# Altium PCB PoactuatorPCB4.PcbDoc (part 3 of 3)
Units mm, origin at the board's own origin, x right, y up, seen from the top; angles counter-clockwise.
Board outline 177.8 x 127 mm, 2 copper layers (Top Layer, Bottom Layer), stack 1.65 mm thick; 145 components, 104 nets, 572 pads, 279 vias.
Unrouted connection lines stored in the file: 19.
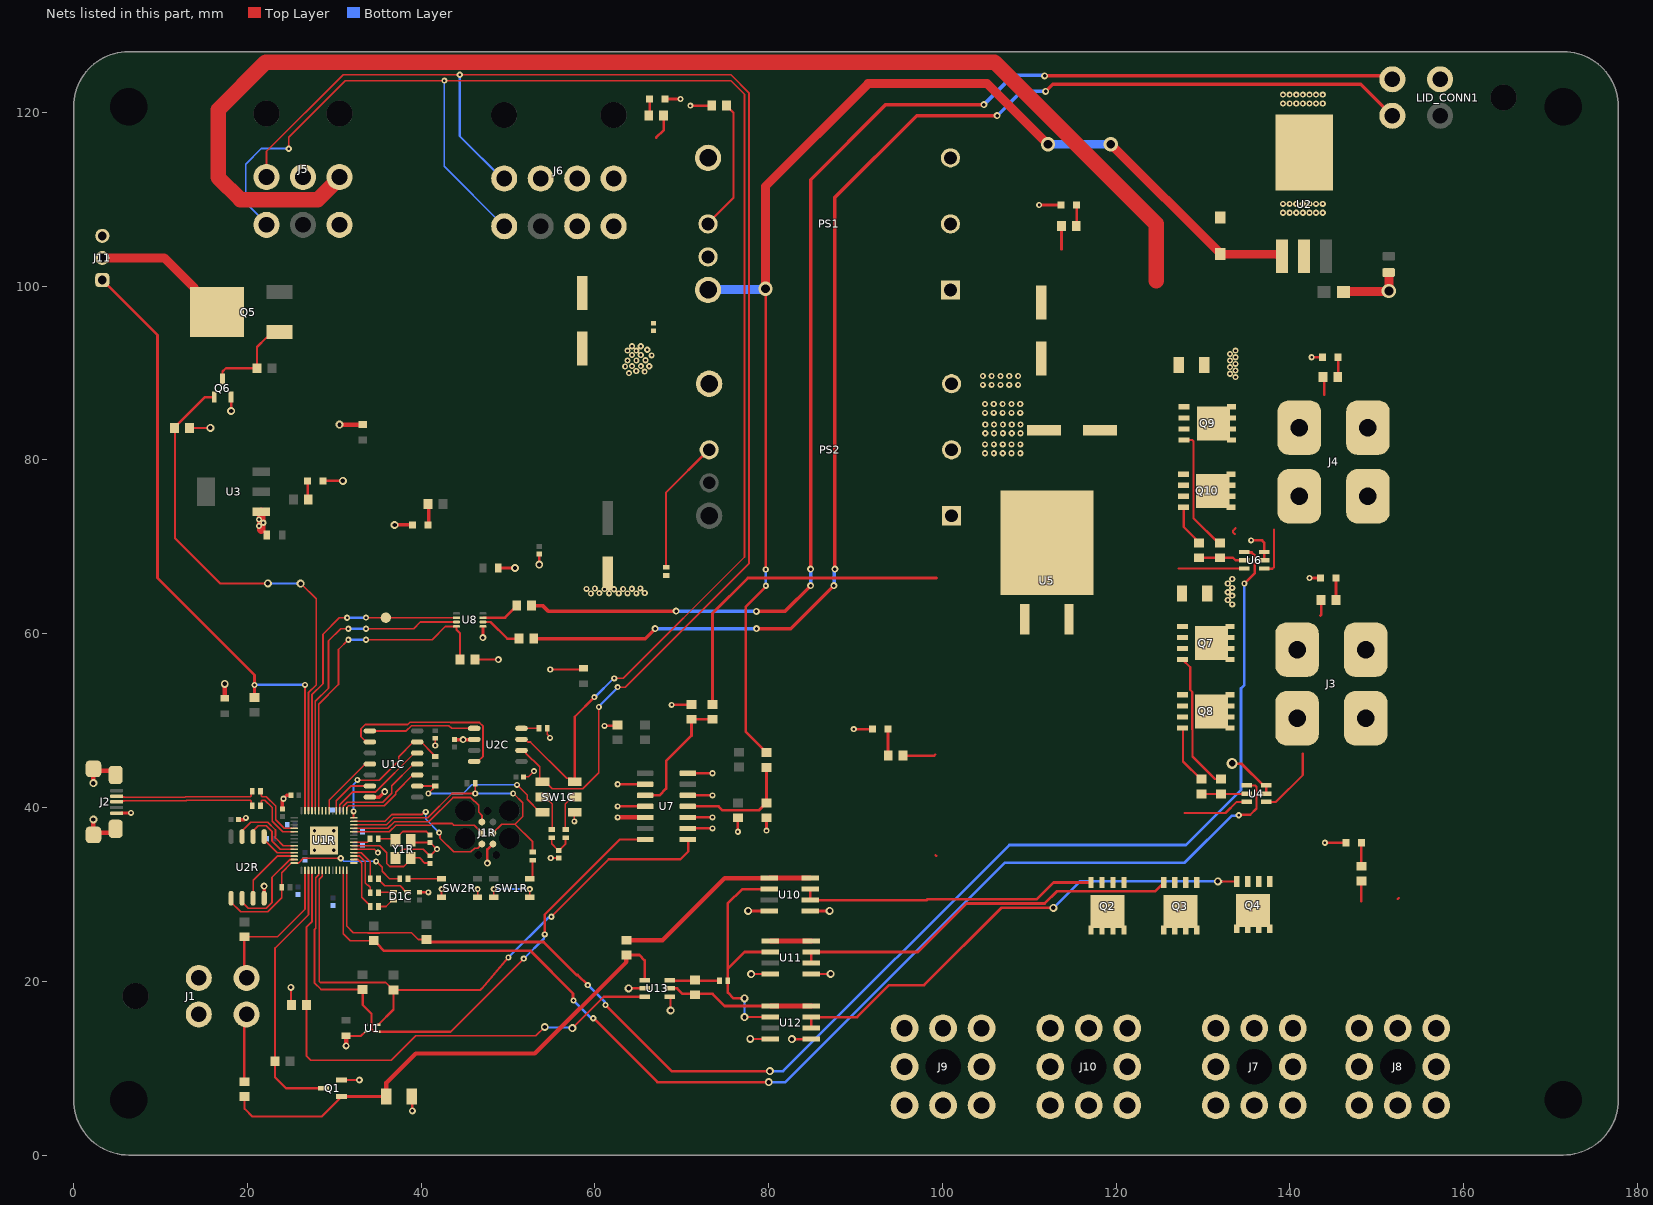
[diagram p2: the nets of this part, all layers, seen from the top]

## Via types
v1: diameter 0.705, hole 0.305, Top Layer to Bottom Layer, tented both sides, 119 vias
v2: diameter 0.7, hole 0.3, Top Layer to Bottom Layer, tented both sides, 51 vias
v3: diameter 0.711, hole 0.305, Top Layer to Bottom Layer, tented both sides, 35 vias
v4: diameter 0.914, hole 0.508, Top Layer to Bottom Layer, tented both sides, 35 vias
v5: diameter 0.8, hole 0.4, Top Layer to Bottom Layer, tented both sides, 28 vias
v6: diameter 1.15, hole 0.7, Top Layer to Bottom Layer, tented both sides, 6 vias
v7: diameter 1.651, hole 1.016, Top Layer to Bottom Layer, tented both sides, 4 vias
v8: diameter 1.27, hole 0.711, Top Layer to Bottom Layer, tented both sides, 1 vias

## Nets (pads, with @x,y where several pads share a name; then routed paths per layer and width w, separated by ;. In a path a pad name is that pad's centre, name@x,y a point inside that pad or via, vN(x,y) a via of type N, cw(c..) or ccw(c..) an arc to the next point about the centre after c; other vN are vias at no path point) (continued)
15V: C5.1 C9.1 C81.1 J5.6 J6.7 J6.8 PS1.7 PS1.8 R21.1 R41.1 U2.1 | length 149.1
  Top Layer w0.305: 67.056,117.094 67.907,117.945 R41.1@67.907,119.634 ; v7(79.629,99.695) 79.66,99.664 v3(79.66,67.39) ; v3(79.68,65.52) 79.68,65.42 77.343,63.083 77.343,48.73 R21.1@79.756,46.317
  Top Layer w1.016: v7(79.629,99.695) 79.629,111.506 91.44,123.317 105.156,123.317 v7(112.141,116.332) ; v7(119.38,116.332) 119.393,116.332 131.953,103.772 C5.1@131.953,103.683 138.62,103.683 138.811,103.492 U2.1@138.811,103.416
  Bottom Layer w0.254: v3(79.66,67.39) 79.67,67.38 79.67,65.53 v3(79.68,65.52) ; v7(112.141,116.332) v7@112.204,116.268
  Bottom Layer w1.016: PS1.8@73.079,99.632 79.566,99.632 v7(79.629,99.695) ; v7@112.204,116.268 112.268,116.332 v7(119.38,116.332)
15V_MEAS: R21.2 R25.1 U7.11 | length 13.7
  Top Layer w0.254: 74.694,39.678 78.858,39.678 ; R25.1@79.692,40.513 R25.1@79.756,40.513
  Top Layer w0.305: U7.11@70.696,40.132 74.24,40.132 74.694,39.678 ; 78.858,39.678 R25.1@79.692,40.513 ; R25.1@79.756,40.513 R21.2@79.756,44.615
ACT_CHECK_3.3V: U1R.38 U8.3 | length 35.8
  Top Layer w0.2: U1R.38@27.829,39.643 27.829,52.213 29.337,53.721 29.337,59.182 30.734,60.579 v3(31.623,60.579)
  Top Layer w0.203: v3(33.655,60.579) 39.152,60.579 39.918,61.345 U8.3@44.068,61.345
  Bottom Layer w0.254: v3(31.623,60.579) v3(33.655,60.579)
ACT_CHECK_5V: LID_CONN1.4 R47.1 | length 152.9
  Top Layer w0.406: R47.1@52.959,59.436 65.786,59.436 v5(66.929,60.579) ; v5(78.6,60.58) v5(78.6,60.58) 82.55,60.579 v5(87.503,65.532) ; v5(87.63,67.437) 87.63,110.236 97.028,119.634 v5(106.299,119.634) ; v5(111.887,122.428) 112.689,123.23 148.16,123.23 LID_CONN1.4@151.78,119.61
  Bottom Layer w0.254: v5(87.503,65.532) v5@87.566,65.596 ; v5@87.566,67.373 v5(87.63,67.437)
  Bottom Layer w0.406: v5(66.929,60.579) v5(78.6,60.58) ; v5@87.566,65.596 v5@87.566,67.373 ; v5(106.299,119.634) 109.093,122.428 v5(111.887,122.428)
ACT_PWM_3.3V: "PWM 3V3.TP" U1R.39 U8.2 | length 37
  Top Layer w0.2: U1R.39@27.429,39.643 27.429,52.981 28.702,54.254 28.702,59.944 30.595,61.837 v3(31.484,61.837)
  Top Layer w0.203: v3(33.655,61.849) U8.2@44.064,61.849
  Bottom Layer w0.254: v3(31.484,61.837) 31.49,61.843 33.649,61.843 v3(33.655,61.849)
ACT_PWM_5V: LID_CONN1.3 R38.1 | length 152.6
  Top Layer w0.305: R38.1@52.705,63.182 R38.1@52.705,63.246
  Top Layer w0.406: R38.1@52.705,63.246 53.975,63.246 54.61,62.611 v5(69.342,62.611) ; v5(78.58,62.58) 81.884,62.58 v5(84.836,65.532) ; v5(84.836,67.437) 84.836,112.268 93.472,120.904 v5(104.775,120.904) ; v5(111.76,124.206) 151.384,124.206 LID_CONN1.3@151.78,123.81
  Bottom Layer w0.254: v5@111.664,124.302 v5(111.76,124.206)
  Bottom Layer w0.406: v5(69.342,62.611) 69.357,62.596 78.564,62.596 v5(78.58,62.58) ; v5(84.836,65.532) v5(84.836,67.437) ; v5(104.775,120.904) 108.173,124.302 v5@111.664,124.302
AUX_SWITCH: J1.4 R34.2 U1R.2 | length 17.6
  Top Layer w0.2: R34.2@19.658,25.123 R34.2@19.709,25.123 ; 26.629,28.28 U1R.2@26.629,32.768
  Top Layer w0.203: R34.2@19.709,25.123 23.472,25.123 26.629,28.28
  Top Layer w0.305: R34.2@19.658,25.123 19.658,20.642 J1.4@19.912,20.388
CANCLK_RP2CAN: U1C.6 U1R.32 | length 5.7
  Top Layer w0.2: U1R.32@30.229,39.643 30.229,40.78 31.914,42.465 U1C.6@34.104,42.465
CANH: J5.4 J6.5 SW1C.4 U2C.7 | length 186.4
  Top Layer w0.203: v3(24.765,115.824) 24.765,117.154 31.267,123.655 v3(42.672,123.655) ; v3@42.715,123.655 75.662,123.655 77.216,122.101 77.216,68.834 63.246,54.864 v2(62.23,54.864) ; U2C.7@51.554,47.84 51.998,47.84 52.296,47.542 52.577,47.542 56.764,43.355 57.279,43.355 SW1C.4@57.679,42.955
  Top Layer w0.254: SW1C.4@57.679,42.955 57.679,50.44 v2(59.944,52.705)
  Bottom Layer w0.203: J5.4@22.334,107.088 19.812,109.61 19.812,114.046 21.612,115.846 24.743,115.846 v3(24.765,115.824) ; v3(42.672,123.655) 42.672,113.783 49.367,107.088 J6.5@49.63,107.088
  Bottom Layer w0.254: v2(59.944,52.705) 60.008,52.705 62.167,54.864 v2(62.23,54.864)
CANL: J5.1 J6.1 SW1C.1 U2C.6 | length 175.4
  Top Layer w0.203: J5.1@22.207,112.561 22.207,115.525 31.015,124.333 v3(44.45,124.333) 75.665,124.333 77.724,122.274 77.724,68.072 63.5,53.848 v2(62.611,53.848) ; U2C.6@51.554,46.57 51.872,46.57 52.055,46.387 52.055,46.256 53.643,44.668 53.643,43.307 SW1C.1@53.979,42.972 ; SW1C.1@53.979,42.955 54.279,42.955 55.081,42.153 58.604,42.153 60.452,44.001 v2(60.452,51.562)
  Bottom Layer w0.254: v3(44.45,124.333) 44.45,117.268 J6.1@49.442,112.277 ; v2(60.452,51.562) 60.452,51.625 62.611,53.784 v2(62.611,53.848)
CANRX_RP2CAN: U1C.2 U2C.4 | length 21.5
  Top Layer w0.2: U1C.2@34.104,47.545 33.679,47.545 33.079,48.145 33.079,49.064 33.56,49.545 38.445,49.545 38.72,49.82 43.36,49.82 43.407,49.773 46.714,49.773 47.129,49.359 47.129,45.9 46.529,45.3 U2C.4@46.104,45.3
CANTX_RP2CAN: U1C.1 U2C.1 | length 12.4
  Top Layer w0.2: U1C.1@34.104,48.815 38.28,48.815 38.885,49.42 43.194,49.42 43.504,49.11 U2C.1@46.104,49.11
DBG_TX_RP2040: J1R.5 U1R.27 | length 18.3
  Top Layer w0.2: U1R.27@32.266,38.405 35.848,38.405 36.648,39.205 40.102,39.205 40.394,39.497 v2(40.53,39.497) ; v2(42.079,37.114) 42.17,37.024 42.17,36.464 43.739,34.895 45.725,34.895 46.153,35.324 46.523,35.324 J1R.5@46.994,35.795
  Bottom Layer w0.2: v2(40.53,39.497) 40.524,39.491 40.524,38.67 v2(42.079,37.114)
FAN_PWR: J11.2 Q5.3 | length 16.4
  Top Layer w1.016: J11.2@3.302,103.251 10.427,103.251 13.932,99.746 13.932,99.543 16.728,96.747 Q5.3@16.931,96.747
FAN_SWITCH: Q6.1 R9.1 U1R.40 | length 62.6
  Top Layer w0.2: v4@26.162,65.786 27.94,64.008 27.94,54.102 27.029,53.191 U1R.40@27.029,39.643
  Top Layer w0.254: R9.1@11.633,83.693 R9.1@11.633,83.757 ; R9.1@11.684,83.693 11.684,70.993 16.891,65.786 v4(22.352,65.786)
  Top Layer w0.305: R9.1@11.633,83.757 15.1,87.224 Q6.1@16.192,87.224
  Bottom Layer w0.254: v4(22.352,65.786) 22.366,65.772 26.109,65.772 v4(26.123,65.759)
FAN_TACH: J11.1 R10.2 U1R.41 | length 88.2
  Top Layer w0.2: v3@26.629,54.198 v3(26.629,54.112) 26.629,52.126 ; 26.629,52.126 U1R.41@26.629,39.643 26.629,52.126
  Top Layer w0.305: J11.1@3.302,100.711 9.652,94.361 9.652,66.421 20.828,55.245 R10.2@20.828,52.667
  Bottom Layer w0.305: v3(20.828,54.102) 20.833,54.107 26.538,54.107 v3@26.607,54.176
GND: C1.2 C1C.2 C1R.2 C2.2 C2C.1 C2R.2 C3.2 C3C.2 C3R.2 C4.2 C4C.2 C4R.2 C5.2 C5C.2 C5R.2 C6.2 C6R.2 C7.2 C7R.2 C8R.2 C9.2 C9R.2 C10.2 C10R.2 C11R.2 C12.2 C12R.2 C13.2 C13R.2 C14.2 C17.2 C18.2 C19.2 C80.2 C81.2 D1.2 D2.2 D3.2 D4.2 D5.2 D6.2 D7.2 D8.2 J1.1 J1.2 J1R.6 J2.5 J2.6 J2.7 J2.8 J2.9 J3.3 J3.4 J4.3 J4.4 J5.2 J6.2 J6.3 J6.4 J9.1 J10.1 J11.3 LID_CONN1.1 PS1.2 PS1.3 PS1.4 PS2.2 PS2.3 PS2.4 Q1.2 Q6.2 R3.1 R6C.2 R9.2 R11.2 R12.2 R13.2 R24.2 R25.2 R26.2 R27.2 R37.2 SW1C.6 SW1R.B1 SW1R.B2 SW2R.B1 SW2R.B2 U1.4 U1C.7 U1R.19 U1R.57 U2.2 U2.4 U2C.2 U2R.4 U3.1 U4.2 U4.3 U6.2 U6.3 U7.2 U7.4 U7.5 U7.9 U7.10 U7.12 U7.14 U8.5 U10.4 U10.5 U11.4 U11.5 U12.4 U12.5 U13.2 U13.4 Y1R.2 Y1R.4 | length 159.6
  Top Layer w0.2: v5(29.929,35.105) U1R.57@30.029,35.205 ; U1R.19@32.266,35.205 34.629,35.205 v2(35.029,34.805) ; SW2R.B1@42.354,29.655 v2(42.354,30.605) ; SW2R.B2@46.504,29.655 v2(46.504,30.605) ; SW1R.B1@48.351,29.75 48.354,29.753 v2(48.354,30.605) ; C3C.2@51.793,43.525 51.805,43.537 52.361,43.537 52.992,44.168 v2(52.992,44.189) ; SW1R.B2@52.504,29.655 v2(52.504,30.605) ; R6C.2@54.504,49.11 54.504,48.435 54.829,48.11 v2(54.829,48.005) ; v2(54.915,34.19) 54.925,34.18 55.819,34.18 C2C.1@55.829,34.17 ; v2(57.629,38.405) 57.629,39.405 SW1C.6@57.679,39.455
  Top Layer w0.203: Y1R.4@37.051,34.205 37.051,34.355 37.903,35.207 40.242,35.207 41.009,34.44 C1R.2@41.029,34.44 41.049,34.44 v2@41.814,35.205 ; Y1R.2@38.829,36.237 39.096,35.97 C2R.2@41.029,35.97 41.049,35.97 v2@41.814,35.205 ; v2(41.629,47.135) C1C.2@41.629,47.97 C1C.2@41.629,48.024 ; v2(41.829,35.205) v2@41.814,35.205 ; SW1R.B1@48.351,29.75 SW1R.B1@48.419,29.682
  Top Layer w0.25: C5C.2@39.829,30.24 v2(40.829,30.24)
  Top Layer w0.254: R9.2@13.335,83.693 v4(15.748,83.693) ; Q6.2@18.098,87.224 Q6.2@18.129,87.192 ; v5(25.019,19.304) 25.019,17.348 R3.1@25.095,17.272 ; D2.2@28.702,77.597 v4(30.988,77.597) ; Q1.2@30.861,8.636 v5(32.893,8.636) ; C1.2@31.369,13.716 33.085,13.716 33.555,14.186 U1.4@33.655,14.186 ; R37.2@46.19,57.023 v5(48.895,57.023) ; v4(53.594,67.945) C80.2@53.594,69.17 ; v2(54.864,55.88) C17.2@58.757,55.88 ; v2(61.104,49.403) 62.522,49.403 R27.2@62.611,49.492 ; v2(62.611,42.672) U7.2@65.786,42.672 ; U13.2@65.735,19.177 U13.2@66.215,19.177 ; U13.4@68.631,18.227 68.707,18.151 v4(68.707,16.637) ; U7.12@70.696,41.402 v2(73.533,41.402) ; U7.14@70.696,43.942 v2(73.533,43.942) ; v3(70.993,120.777) R12.2@73.439,120.777 ; v4(77.627,28.097) v4@77.643,28.082 ; v4(77.881,13.365) 77.897,13.35 80.173,13.35 U12.4@80.188,13.335 ; v4(77.978,20.828) U11.4@80.188,20.828 ; U10.4@80.173,28.082 U10.4@80.188,28.067 ; v4(82.677,13.335) U12.5@84.912,13.335 ; U11.5@84.912,20.828 84.927,20.843 v4(87.137,20.843) v4@87.152,20.858 ; U10.5@84.912,28.067 U10.5@84.927,28.082 ; v4@87.01,28.082 v4(87.025,28.097) ; v3(135.528,70.739) v3@135.616,70.652 ; U6.3@136.586,69.53 136.713,69.403 U6.3@137.033,69.403 ; v3(144.018,35.941) D8.2@146.431,35.941
  Top Layer w0.3: v5(47.631,33.597) 47.631,35.162 J1R.6@48.264,35.795
  Top Layer w0.305: J2.5@5.469,39.35 5.484,39.365 6.589,39.365 v3(6.604,39.38) ; v4(18.129,85.63) Q6.2@18.129,87.192 ; C2.2@38.925,6.731 38.989,6.667 v5(38.989,5.08) ; v5@47.115,59.565 U8.5@47.115,60.842 ; C19.2@48.895,67.564 v4(50.8,67.564) ; v2(62.611,40.132) U7.4@65.786,40.132 ; v4(63.881,19.177) U13.2@65.735,19.177 ; D4.2@68.072,121.539 v3(69.85,121.539) ; v2(68.834,51.816) R24.2@71.082,51.816 ; U7.9@70.696,37.592 v2(73.533,37.592) ; U7.10@70.696,38.862 v2(73.533,38.862) ; v2(76.454,37.211) R26.2@76.454,38.811 ; v4@77.643,28.082 U10.4@80.173,28.082 ; v2(79.756,37.338) R25.2@79.756,38.811 ; U10.5@84.927,28.082 v4@87.01,28.082 ; v2(89.789,49.022) D5.2@91.948,49.022 ; v3(111.125,109.347) D1.2@113.665,109.347 ; v8(133.35,45.085) 133.401,45.034 134.442,45.034 136.931,42.545 U4.3@137.287,42.545 U4.2@137.287,41.595 ; v3(135.528,70.739) 136.779,70.739 137.033,70.485 U6.3@137.033,69.403 U6.2@137.033,68.453 ; v3(142.24,66.421) D7.2@143.51,66.421 ; v3(142.494,91.821) D6.2@143.764,91.821 D6.2@143.853,91.821
  Top Layer w0.4: C3R.2@18.994,38.605 19.629,38.605 v2(19.829,38.805) ; U2R.4@21.934,29.554 v5(21.934,30.958) ; C4R.2@24.029,39.84 24.029,40.799 24.154,40.924 v2(24.154,41.005) 24.554,41.405 25.031,41.405 C10R.2@25.038,41.412 ; U1C.7@34.104,41.195 35.192,41.195 v5(35.816,41.818) ; C4C.2@43.829,47.84 43.847,47.823 44.812,47.823 v5(44.829,47.805) 44.847,47.823 46.086,47.823 U2C.2@46.104,47.84
  Top Layer w0.406: v4(36.957,72.517) D3.2@38.989,72.517
  Top Layer w0.508: J2.8@2.286,36.85 v4(2.286,38.618) ; v4(2.286,42.809) 2.286,43.942 2.55,44.206 4.38,44.206 J2.6@4.836,43.75 ; J2.8@2.794,36.85 2.794,36.971 2.917,37.094 4.38,37.094 J2.7@4.836,37.55 ; C18.2@17.399,52.705 v4(17.399,54.229) ; v4(30.607,84.074) C3.2@33.274,84.074 ; v5(31.369,12.573) C1.2@31.369,13.716 ; v2(62.611,38.862) U7.5@65.786,38.862
  Top Layer w1.016: U3.1@21.59,74.027 21.607,74.027 21.599,74.019 21.599,73.152 21.599,71.987 ; C6.2@146.234,99.187 146.234,99.232 146.38,99.377 151.32,99.377 v7(151.384,99.441) R11.2@151.384,101.257
  Top Layer w1.778: U2.4@141.351,115.367 U2.4@141.478,115.494
  Bottom Layer w0.254: v2(48.354,30.605) v2(52.504,30.605) ; v2@54.846,55.862 v2(54.864,55.88) ; v2@62.491,38.862 v2(62.611,38.862)
  other v1: 133.35,63.373 132.842,63.881 133.35,64.389 59.54,64.63 61.64,64.65 62.738,64.643 63.76,64.65 64.77,64.64 60.51,64.67 65.74,64.68 132.842,64.77 61.1,65.13 62.2,65.12 59.03,65.16 63.246,65.151 64.26,65.17 60,65.21 65.23,65.22 133.35,65.278 132.842,65.786 133.35,66.294 21.336,72.39 21.844,72.771 21.336,73.152 104.902,80.772 105.918,80.772 106.934,80.772 107.95,80.772 108.966,80.772 104.902,81.788 105.918,81.788 106.934,81.788 107.95,81.788 108.966,81.788 104.922,83.072 105.938,83.072 106.954,83.072 107.97,83.072 108.986,83.072 104.922,84.088 105.938,84.088 106.954,84.088 107.97,84.088 108.986,84.088 104.892,85.422 105.908,85.422 106.924,85.422 107.94,85.422 108.956,85.422 104.892,86.438 105.908,86.438 106.924,86.438 107.94,86.438 108.956,86.438 104.648,88.646 105.664,88.646 106.68,88.646 107.696,88.646 108.712,88.646 133.731,89.535 104.648,89.662 105.664,89.662 106.68,89.662 107.696,89.662 108.712,89.662 133.096,89.916 63.93,89.99 65.73,90.16 64.76,90.24 133.731,90.297 133.096,90.678 63.48,90.76 66.26,90.78 64.276,90.798 65.292,90.798 133.731,91.059 63.754,91.44 64.77,91.44 133.096,91.44 65.83,91.47 133.731,91.821 66.53,92.03 64.262,92.075 65.278,92.075 133.096,92.202 63.754,92.583 64.77,92.583 133.731,92.583 66.02,92.69 64.262,93.091 65.278,93.091 139.192,108.458 139.954,108.458 140.716,108.458 141.478,108.458 142.24,108.458 143.002,108.458 143.764,108.458 139.192,109.474 139.954,109.474 140.716,109.474 141.478,109.474 142.24,109.474 143.002,109.474 143.764,109.474 139.192,121.031 139.954,121.031 140.716,121.031 141.478,121.031 142.24,121.031 143.002,121.031 143.764,121.031 139.192,122.047 139.954,122.047 140.716,122.047 141.478,122.047 142.24,122.047 143.002,122.047 143.764,122.047
  other v5: 27.729,35.105 27.729,37.305 29.929,37.305 47.117,59.563
INT_RP2CAN: U1C.4 U1R.34 | length 7.5
  Top Layer w0.2: U1R.34@29.429,39.705 29.429,40.863 33.571,45.005 U1C.4@34.104,45.005
KILL_SWITCH: J1.3 R8.2 | length 7.9
  Top Layer w0.254: R8.2@19.658,8.46 R8.2@19.685,8.433
  Top Layer w0.305: R8.2@19.658,8.46 19.658,15.934 J1.3@19.912,16.188
LEDB_RP2CAN: R8C.1 U1R.18 | length 4.3
  Top Layer w0.2: U1R.18@32.266,34.805 33.101,34.805 34.154,33.752 R8C.1@34.154,31.805
LEDG_RP2CAN: R7C.1 U1R.17 | length 5.4
  Top Layer w0.2: U1R.17@32.266,34.405 32.935,34.405 33.579,33.761 33.579,31.306 33.829,31.055 33.904,31.055 34.154,30.805 R7C.1@34.154,30.205
LEDR_RP2CAN: R5C.1 U1R.16 | length 6.5
  Top Layer w0.2: U1R.16@32.266,34.005 32.77,34.005 33.179,33.596 33.179,29.68 34.154,28.705 R5C.1@34.154,28.605
LVL_SHIFT_EN: R37.1 U1R.37 U8.4 | length 38.1
  Top Layer w0.2: U1R.37@28.229,39.643 28.229,39.98 28.229,51.902 30.494,54.167 30.494,54.18
  Top Layer w0.203: 30.494,54.18 30.494,58.18 v3(31.623,59.309) ; v3(33.655,59.309) 41.275,59.309 42.811,60.845 U8.4@44.068,60.845
  Top Layer w0.254: U8.4@44.068,60.845 44.068,60.455 44.488,60.034 R37.1@44.488,57.023
  Bottom Layer w0.254: v3(31.623,59.309) v3(33.655,59.309)
MISO_RP2CAN: U1C.12 U1R.31 | length 12.1
  Top Layer w0.2: U1R.31@30.629,39.643 30.629,40.311 32.113,41.795 34.757,41.795 39.237,46.275 U1C.12@39.554,46.275
MOSI_RP2CAN: U1C.11 U1R.30 | length 11.5
  Top Layer w0.2: U1R.30@31.029,39.643 31.029,40.146 31.478,40.595 35.582,40.595 36.629,41.642 36.629,42.505 39.129,45.005 U1C.11@39.554,45.005
MOTOR_EN: R1.1 R5.2 U13.6 | length 5.9
  Top Layer w0.305: U13.6@68.43,20.053 71.755,20.053 R5.2@74.328,20.053
MOTOR_PWR: J7.1 J8.1 Q2.D Q3.D Q4.D R46.1 | length 2.5
  Top Layer w0.254: 148.209,29.21 R46.1@148.209,31.534 ; 152.4,29.464 152.527,29.591
nCS_RP2CAN: R4C.2 U1C.13 U1R.28 | length 16.4
  Top Layer w0.2: v2(32.229,39.545) 32.229,38.805 U1R.28@32.266,38.805 ; v2(32.659,43.175) 32.699,43.135 35.159,43.135 37.422,45.398 37.422,45.838 39.129,47.545 U1C.13@39.554,47.545 39.979,47.545 41.354,46.17 41.354,46.055 41.529,45.88 R4C.2@41.629,45.88
  Bottom Layer w0.2: v2(32.229,39.545) 32.229,42.686 32.659,43.116 v2(32.659,43.175)
NetC2_1: C2.1 Q1.1 R6.2 R8.1 U13.1 | length 59.4
  Top Layer w0.254: R8.1@19.685,6.731 19.685,5.334 20.574,4.445 28.575,4.445 Q1.1@30.861,6.731
  Top Layer w0.305: Q1.1@30.861,6.731 C2.1@36.005,6.731 ; R6.2@63.627,23.025 65.113,23.025 65.735,22.403 U13.1@65.735,20.127
  Top Layer w0.508: C2.1@36.005,6.731 36.005,8.319 39.37,11.684 53.086,11.684 63.627,22.225 R6.2@63.627,23.025
NetC2C_2: C2C.2 R2C.2 R3C.2 | length 3.7
  Top Layer w0.2: R2C.2@55.029,36.53 55.029,35.82 55.809,35.04 C2C.2@55.829,35.04 55.849,35.04 56.629,35.82 R3C.2@56.629,36.53
NetC2R_1: C2R.1 R1R.2 Y1R.3 | length 6.7
  Top Layer w0.203: R1R.2@35.077,36.405 36.883,36.405 Y1R.3@37.051,36.237 37.051,36.387 37.903,37.239 40.61,37.239 41.009,36.84 C2R.1@41.029,36.84
NetD1_1: D1.1 R40.2 | length 2.4
  Top Layer w0.254: R40.2@115.405,106.934 R40.2@115.443,106.972
  Top Layer w0.305: R40.2@115.443,106.972 D1.1@115.443,109.347
NetD1C_1: D1C.1 R5C.2 | length 2
  Top Layer w0.2: R5C.2@35.104,28.605 35.954,28.605 36.704,29.355 D1C.1@36.829,29.355
NetD1C_2: D1C.2 R7C.2 | length 1.7
  Top Layer w0.2: R7C.2@35.104,30.205 35.154,30.255 D1C.2@36.829,30.255
NetD1C_3: D1C.3 R8C.2 | length 4
  Top Layer w0.2: R8C.2@35.104,31.805 35.104,31.705 35.829,30.98 37.579,30.98 38.304,30.255 D1C.3@38.429,30.255
NetD2_1: D2.1 R39.2 | length 2.2
  Top Layer w0.254: D2.1@26.924,77.597 26.94,77.581 R39.2@26.94,75.438
NetD3_1: D3.1 R42.2 | length 2.2
  Top Layer w0.406: D3.1@40.894,72.809 R42.2@40.894,75.057
NetD4_1: D4.1 R41.2 | length 1.9
  Top Layer w0.254: R41.2@66.205,119.634 R41.2@66.294,119.723
  Top Layer w0.305: R41.2@66.294,119.723 D4.1@66.294,121.539
NetD5_1: D5.1 R44.2 | length 3.1
  Top Layer w0.254: R44.2@93.726,46.012 R44.2@93.764,45.974
  Top Layer w0.305: R44.2@93.726,46.012 D5.1@93.726,49.022
NetD6_1: D6.1 R43.2 | length 2.3
  Top Layer w0.254: R43.2@145.504,89.535 R43.2@145.542,89.573
  Top Layer w0.305: R43.2@145.542,89.573 D6.1@145.542,91.821
NetD7_1: D7.1 R45.2 | length 2.5
  Top Layer w0.305: R45.2@145.288,63.881 D7.1@145.288,66.421
NetD8_1: D8.1 R46.2 | length 2.7
  Top Layer w0.254: R46.2@148.209,33.236 D8.1@148.209,35.941
NetPS1_6: PS1.6 R12.1 | length 15
  Top Layer w0.254: PS1.6@73.045,107.265 75.946,110.166 75.946,119.977 R12.1@75.146,120.777
NetPS2_6: PS2.6 R13.1 | length 15.7
  Top Layer w0.254: R13.1@68.199,67.658 68.199,76.267 PS2.6@73.192,81.26
NetQ2_4: Q2.4 U10.6 U10.7 | length 34.4
  Top Layer w0.305: U10.7@84.785,30.607 U10.6@84.785,29.337 98.184,29.337 98.304,29.458 110.865,29.458 112.776,31.369 Q2.4@117.094,31.369
NetQ3_4: Q3.4 U11.6 U11.7 | length 45.1
  Top Layer w0.254: U11.6@84.912,22.098 U11.7@84.912,23.368
  Top Layer w0.305: U11.7@84.912,23.368 97.18,23.368 102.765,28.953 111.757,28.953 113.157,30.353 124.46,30.353 Q3.4@125.476,31.369
NetQ4_4: Q4.4 U12.6 U12.7 | length 57.2
  Top Layer w0.254: U12.6@84.912,14.605 U12.7@84.912,15.875 ; v4(131.699,31.496) Q4.4@133.858,31.496
  Top Layer w0.305: U12.7@84.912,15.875 90.17,15.875 93.853,19.558 97.879,19.558 106.769,28.448 v4(112.776,28.448)
  Bottom Layer w0.254: v4(131.699,31.496) 132.207,31.496
  Bottom Layer w0.305: v4(112.776,28.448) 115.824,31.496 v4(131.699,31.496)
NetQ5_1: Q5.1 Q6.3 R7.2 | length 10.6
  Top Layer w0.254: Q6.3@17.145,89.306 17.149,89.31 17.149,90.174 17.526,90.551 R7.2@21.12,90.551 21.12,93.002 22.187,94.069 22.885,94.069 Q5.1@23.578,94.762
NetQ7_4: Q7.4 R15.1 | length 16
  Top Layer w0.254: Q7.4@127.635,57.023 128.524,56.134 128.524,53.536 128.756,53.304 128.756,48.963 128.778,48.941 128.778,45.867 131.376,43.269 R15.1@132.08,43.269
NetQ8_4: Q8.4 R16.1 | length 6.8
  Top Layer w0.254: Q8.4@127.698,49.149 127.698,45.301 129.731,43.269 R16.1@129.794,43.269
NetQ9_4: Q9.4 R18.1 | length 14.1
  Top Layer w0.254: Q9.4@127.825,82.296 128.734,82.296 128.883,82.147 128.883,73.327 131.762,70.447 R18.1@131.826,70.447
NetQ10_4: Q10.4 R19.1 | length 4.9
  Top Layer w0.254: Q10.4@127.762,74.549 127.762,72.288 R19.1@129.603,70.447
NetR2C_1: R2C.1 SW1C.2 | length 4.4
  Top Layer w0.2: SW1C.2@53.979,41.205 54.279,41.205 55.079,40.405 55.079,37.53 R2C.1@55.029,37.48
NetR3C_1: R3C.1 SW1C.5 | length 4.4
  Top Layer w0.2: R3C.1@56.629,37.48 56.579,37.53 56.579,40.405 57.379,41.205 SW1C.5@57.679,41.205
NetR5_1: R5.1 U10.2 U11.2 U12.2 | length 28.8
  Top Layer w0.254: R5.1@75.278,20.066 R5.1@75.295,20.05 ; v4(77.216,15.875) 78.181,15.876 ; 78.181,15.875 U12.2@80.188,15.875
  Top Layer w0.305: R5.1@75.278,20.066 75.278,21.43 ; R5.1@75.295,20.05 75.295,18.685 75.946,18.034 v4(77.216,18.034) ; U10.2@80.061,30.607 76.962,30.607 75.278,28.923 75.278,21.43 ; U11.2@80.188,23.368 77.216,23.368 75.278,21.43
  Bottom Layer w0.254: v4(77.216,15.875) v4(77.216,18.034)
NetR6C_1: R6C.1 U2C.8 | length 2
  Top Layer w0.2: U2C.8@51.554,49.11 R6C.1@53.554,49.11
NetR6R_1: R6R.1 SW1R.A2 | length 4.6
  Top Layer w0.2: SW1R.A2@52.604,31.805 SW1R.A2@52.829,32.03 ; SW1R.A2@52.604,31.805 SW1R.A2@52.504,31.805 SW1R.A2@52.604,31.805 ; SW1R.A2@52.604,31.805 SW1R.A2@52.829,32.03 ; SW1R.A2@52.829,32.03 R6R.1@52.829,33.93 SW1R.A2@52.829,32.03
NetR7R_1: R7R.1 SW2R.A1 | length 3.8
  Top Layer w0.2: R7R.1@38.504,31.805 SW2R.A1@42.354,31.805
NetR15_2: R15.2 R16.2 U4.5 | length 5.2
  Top Layer w0.254: R16.2@129.794,41.567 134.973,41.567 U4.5@135.001,41.595
NetR18_2: R18.2 R19.2 U6.5 | length 4.6
  Top Layer w0.254: R19.2@129.667,68.745 131.826,68.745 133.439,68.745 133.731,68.453 134.112,68.453
NetR38_2: R38.2 U8.7 | length 4.5
  Top Layer w0.254: U8.7@47.118,61.845 49.666,61.845 ; R38.2@51.003,63.182 R38.2@51.003,63.246
  Top Layer w0.305: 49.666,61.845 R38.2@51.003,63.182
NetR47_2: R47.2 U8.6 | length 4.9
  Top Layer w0.254: U8.6@47.118,61.345 48.002,61.345
  Top Layer w0.279: 48.002,61.345 49.911,59.436
  Top Layer w0.305: 49.911,59.436 R47.2@51.257,59.436
NetU1R_5: U1R.5
NetU1R_8: U1R.8
NetU1R_9: U1R.9
NetU1R_11: U1R.11
NetU1R_12: U1R.12
NetU1R_15: U1R.15
NetU1R_35: U1R.35
NetU1R_36: U1R.36
PHYS_KILL: Q1.3 R2.2 U1R.3 | length 31.5
  Top Layer w0.2: R2.2@23.19,10.795 23.19,23.825 27.031,27.666 27.031,30.191 27.029,30.193 U1R.3@27.029,32.768
  Top Layer w0.254: R2.2@23.19,10.795 23.19,8.941 24.447,7.683 Q1.3@28.778,7.683
PORT_STAT: R31.2 U1R.13 U4.4 | length 136.7
  Top Layer w0.2: 31.029,25.486 U1R.13@31.029,32.768
  Top Layer w0.203: 31.029,25.486 31.779,24.736 31.839,24.676 R31.2@34.544,24.676
  Top Layer w0.254: v3(134.112,39.116) 134.163,39.167 135.433,39.167 136.144,39.878 136.144,42.396 135.995,42.545 U4.4@135.001,42.545
  Top Layer w0.305: R31.2@34.544,24.676 34.9,24.32 35.725,23.495 52.619,23.495 ; 52.619,23.454 57.48,18.593 57.48,17.831 v3(57.531,17.78) ; v3(59.817,15.748) 67.183,8.382 v4(80.01,8.382)
  Bottom Layer w0.254: v3@59.753,15.748 v3(59.817,15.748)
  Bottom Layer w0.305: v3(57.531,17.78) 59.485,15.826 59.676,15.826 v3@59.753,15.748 ; v4(80.01,8.382) 81.915,8.382 107.188,33.655 127.889,33.655 133.299,39.065 134.061,39.065 v3(134.112,39.116)
QSPI_SCLK_RP2040: U1R.52 U2R.6 | length 7.3
  Top Layer w0.2: U2R.6@20.664,36.755 20.664,37.305 21.264,37.905 22.183,37.905 22.829,37.259 22.829,36.175 23.799,35.205 U1R.52@25.392,35.205
QSPI_SD0_RP2040: U1R.53 U2R.5 | length 4.5
  Top Layer w0.2: U2R.5@21.934,36.755 21.934,36.3 23.429,34.805 U1R.53@25.392,34.805
QSPI_SD1_RP2040: U1R.55 U2R.2 | length 10.9
  Top Layer w0.2: U2R.2@19.394,29.655 19.394,29.105 20.094,28.405 20.414,28.405 20.415,28.404 22.183,28.404 22.829,29.05 22.829,31.946 24.888,34.005 U1R.55@25.392,34.005
QSPI_SD2_RP2040: U1R.54 U2R.3 | length 7.9
  Top Layer w0.2: U2R.3@20.664,29.655 20.664,31.64 23.429,34.405 U1R.54@25.392,34.405
QSPI_SD3_RP2040: U1R.51 U2R.7 | length 8.6
  Top Layer w0.2: U2R.7@19.394,36.755 19.394,37.305 20.394,38.305 22.348,38.305 23.241,37.412 23.241,36.498 24.135,35.605 U1R.51@25.392,35.605
QSPI_SS_RP2040: R5R.2 R7R.2 U1R.56 U2R.1 | length 25.6
  Top Layer w0.2: U2R.1@18.124,29.655 18.124,29.105 19.225,28.004 22.348,28.004 23.954,29.609 R5R.2@23.954,30.805 23.954,32.505 U1R.56@25.054,33.605 ; U1R.56@25.392,33.605 25.895,33.605 26.445,34.155 v2(30.745,34.155) ; v2(34.829,33.805) 35.518,33.116 35.518,32.648 36.361,31.805 R7R.2@37.554,31.805
  Bottom Layer w0.2: v2(30.745,34.155) 30.762,34.155 31.112,33.805 v2(34.829,33.805)
RUN_RP2040: J1R.4 R4R.2 R6R.2 U1R.26 | length 32.4
  Top Layer w0.2: U1R.26@32.266,38.005 36.013,38.005 36.813,38.805 40.757,38.805 43.557,41.605 v2(46.229,41.605) R4R.2@46.229,42.805 ; J1R.4@48.264,37.065 49.269,38.07 50.805,38.07 ; v2(50.595,41.605) 50.629,41.605 51.704,40.53 51.704,38.969 50.805,38.07 ; R6R.2@52.829,34.88 52.829,36.046 50.805,38.07
  Bottom Layer w0.2: v2(46.229,41.605) v2(50.595,41.605)
SCK_RP2CAN: U1C.10 U1R.29 | length 10.2
  Top Layer w0.2: U1R.29@31.429,39.643 31.429,39.98 31.644,40.195 35.748,40.195 37.074,41.522 37.074,41.77 39.04,43.735 U1C.10@39.554,43.735
SCL: R33.2 U1.2 U1R.7 U7.8 | length 68.7
  Top Layer w0.2: 28.28,25.689 28.28,19.975 28.397,19.858 35.918,19.858 36.767,19.009 R33.2@36.83,19.009 ; 28.433,31.901 28.629,32.096 U1R.7@28.629,32.768
  Top Layer w0.203: 28.28,25.689 28.28,31.747 28.433,31.901
  Top Layer w0.254: U1.2@35.055,14.986 36.83,16.761 R33.2@36.83,19.009 46.717,19.009 46.822,19.009 46.971,19.158 v3(50.038,22.733) ; v3(54.991,27.432) 61.595,34.036 69.85,34.036 70.739,34.925 70.739,36.279 U7.8@70.696,36.322
  Bottom Layer w0.254: v3(50.038,22.733) 54.65,27.345 54.904,27.345 v3(54.991,27.432)
SDA: R32.2 U1.1 U1R.6 U7.7 | length 66.4
  Top Layer w0.2: 27.719,25.941 27.878,26.1 27.878,31.914 28.229,32.264 U1R.6@28.229,32.768
  Top Layer w0.203: 27.719,25.941 27.719,19.814 28.482,19.05 R32.2@33.274,19.05
  Top Layer w0.254: R32.2@33.274,19.05 33.274,17.272 34.29,16.256 34.29,14.478 34.582,14.186 43.396,14.186 v3(51.816,22.606) ; v3(54.229,25.4) 54.229,27.686 62.865,36.322 U7.7@65.786,36.322
  Bottom Layer w0.254: v3(51.816,22.606) 54.142,24.932 54.142,25.313 v3(54.229,25.4)
SOFTWARE_KILL: R3.2 U1R.4 U13.3 | length 63.9
  Top Layer w0.2: 27.429,30.358 U1R.4@27.429,32.768
  Top Layer w0.203: 27.432,30.357 27.432,26.924 cw(c27.219,26.924) 27.37,26.774 26.797,26.201 R3.2@26.797,17.272 26.797,11.43 27.305,10.922 36.576,10.922 39.37,13.716 53.213,13.716 v4(54.229,14.732)
  Top Layer w0.254: v4(57.404,14.605) 61.026,18.227 U13.3@65.735,18.227
  Bottom Layer w0.254: v4(54.229,14.732) 54.292,14.668 57.34,14.668 v4(57.404,14.605)
STBD_STAT: R30.2 U1R.14 U6.4 | length 158.8
  Top Layer w0.2: U1R.14@31.429,32.768 31.429,26.356 32.209,25.576
  Top Layer w0.203: 32.209,25.576 33.84,25.576 33.848,25.568 35.24,25.568 35.248,25.576 38.889,25.576 39.662,24.803 R30.2@40.64,24.803
  Top Layer w0.305: R30.2@40.64,24.803 40.932,24.511 54.102,24.511 57.885,20.728 58.012,20.728 v3(59.182,19.558) ; v3(61.214,17.272) 68.834,9.652 v4(80.137,9.652) ; v3(134.747,65.786) 135.963,67.002 135.963,68.975 135.591,69.347 134.803,69.347 U6.4@134.747,69.403
  Bottom Layer w0.254: v3(61.214,17.272) v3@61.214,17.335
  Bottom Layer w0.305: v3(59.182,19.558) 61.136,17.604 61.136,17.413 v3@61.214,17.335 ; v4(80.137,9.652) 81.661,9.652 107.696,35.687 112.871,35.687 128.016,35.687 134.366,42.037 134.366,53.721 134.747,54.102 v3(134.747,65.786)
SWCLK_RP2040: J1R.3 U1R.24 | length 15.6
  Top Layer w0.2: U1R.24@32.266,37.205 36.345,37.205 37.105,37.965 41.052,37.965 41.251,38.164 43.573,38.164 43.772,37.965 46.094,37.965 J1R.3@46.994,37.065
SWDIO_RP2040: J1R.1 U1R.25 | length 18.3
  Top Layer w0.2: U1R.25@32.266,37.605 36.179,37.605 36.939,38.365 40.886,38.365 43.661,41.14 45.725,41.14 46.624,40.241 46.624,39.481 46.994,39.111 J1R.1@46.994,38.335
TERM_DET_RP2CAN: R1C.2 SW1C.3 U1C.9 | length 18.4
  Top Layer w0.2: U1C.9@39.554,42.465 R1C.2@41.529,42.465 ; v2(40.829,41.605) 41.354,42.13 41.354,42.29 R1C.2@41.529,42.465 ; R1C.2@41.629,42.465 R1C.2@41.529,42.465 ; v2(51.029,42.605) 52.199,41.435 52.199,40.935 53.679,39.455 SW1C.3@53.979,39.455
  Bottom Layer w0.2: v2(40.829,41.605) 44.829,41.605 45.829,42.605 v2(51.029,42.605)
USB_N: J2.2 R3R.1 | length 16.2
  Top Layer w0.203: J2.2@4.961,41.3 5.059,41.202 5.805,41.202 5.828,41.178 12.808,41.178 12.877,41.247 20.336,41.247 20.455,41.366 20.455,41.783 R3R.1@20.554,41.882
USB_P: J2.3 R2R.1 | length 16.2
  Top Layer w0.203: J2.3@4.961,40.65 5.059,40.748 5.805,40.748 5.828,40.772 12.977,40.772 13.045,40.84 20.336,40.84 20.455,40.721 20.455,40.304 R2R.1@20.554,40.205
USB_RP2040_N: R3R.2 U1R.46 | length 6.8
  Top Layer w0.2: R3R.2@21.504,41.882 21.599,41.787 21.599,41.36 21.716,41.243 22.187,41.243 23.265,40.166 23.265,38.578 24.238,37.605 U1R.46@25.392,37.605
USB_RP2040_P: R2R.2 U1R.47 | length 6.8
  Top Layer w0.2: R2R.2@21.504,40.205 21.599,40.3 21.599,40.726 21.716,40.843 22.022,40.843 22.865,40 22.865,38.413 24.073,37.205 U1R.47@25.392,37.205
V+: C13.1 C14.1 J5.3 Q2.1 Q2.2 Q2.3 Q3.1 Q3.2 Q3.3 Q4.1 Q4.2 Q4.3 Q7.1 Q7.2 Q7.3 Q8.1 Q8.2 Q8.3 Q9.1 Q9.2 Q9.3 Q10.1 Q10.2 Q10.3 R1.2 R6.1 R44.1 U4.6 U5.1 U5.3 U6.6 U10.1 U10.8 U11.1 U11.8 U12.1 U12.8 U13.5 | length 213.6
  Top Layer w0.254: 99.06,45.974 99.187,46.101 ; 99.187,34.544 99.314,34.417 ; 127.2,67.503 U6.6@134.747,67.503 ; 127.889,39.37 132.588,39.37 133.863,40.645 U4.6@135.001,40.645
  Top Layer w0.305: U13.5@68.631,19.177 69.469,19.177 70.091,18.555 71.501,18.555 73.533,18.555 74.943,17.145 U12.1@80.188,17.145 ; R44.1@95.466,45.974 99.06,45.974
  Top Layer w0.508: R6.1@63.627,24.727 67.78,24.727 74.93,31.877 U10.1@80.061,31.877
  Top Layer w0.559: U10.1@80.061,31.877 U10.8@84.785,31.877 ; U12.1@80.188,17.145 U12.8@84.912,17.145 ; U11.1@80.188,24.638 U11.8@84.912,24.638
  Top Layer w1.778: J5.3@30.734,112.588 28.118,109.972 19.187,109.972 16.635,112.524 16.635,120.299 22.12,125.784 105.991,125.784 124.587,107.188 124.587,100.637
VPORT: J3.1 J3.2 Q7.D Q8.D R45.1 U4.1 | length 10.4
  Top Layer w0.254: U4.1@137.287,40.645 138.398,40.645 141.478,43.725 141.478,46.228
  Top Layer w0.305: 143.51,62.103 143.587,62.18 R45.1@143.586,63.881
  Bottom Layer w0.305: J3.1@141.198,50.175 J3.1@141.198,50.8
Vreg: C7.1 C10.1 PS1.1 PS2.1 R20.1 R40.1 U5.2 | length 40.7
  Top Layer w0.305: R20.1@73.533,51.778 73.533,62.357 77.597,66.421 99.314,66.421 ; 113.703,104.264 R40.1@113.703,106.934
Vreg_MEAS: R20.2 R24.1 U7.3 | length 14.4
  Top Layer w0.305: U7.3@65.786,41.402 67.437,41.402 68.199,42.164 68.199,45.339 71.12,48.26 R24.1@71.12,50.165 R20.2@73.533,50.165
VSTBD: J4.1 J4.2 Q9.D Q10.D R43.1 U6.1 | length 8.5
  Top Layer w0.254: 133.644,71.461 133.455,71.65 133.455,71.86 133.731,72.136 ; U6.1@137.033,67.503 U6.1@137.389,67.503 ; U6.1@137.389,67.472 137.957,67.472 138.176,67.691 138.176,71.998
  Top Layer w0.305: 143.929,87.541 R43.1@143.929,89.662
XIN_RP2040: C1R.1 U1R.20 Y1R.1 | length 11.3
  Top Layer w0.2: U1R.20@32.266,35.605 35.229,35.605 36.029,34.805 36.029,33.553 36.377,33.205 37.979,33.205 38.829,34.055 Y1R.1@38.829,34.205 39.827,34.205 40.429,33.603 40.997,33.603 C1R.1@41.029,33.57
XOUT_RP2040: R1R.1 U1R.21 | length 2.1
  Top Layer w0.2: U1R.21@32.266,36.005 33.827,36.005 34.127,36.305 R1R.1@34.127,36.405
pads on no net: J1. J1R.A J1R.B J1R.C J1R.D J1R.E J1R.F J1R.G J2.1 J2.4 J5. J6. J7.8 J8.8 J9.8 J10.8 LID_CONN1. SW1R.A1 SW2R.A2 U1C.3 U1C.5 U1C.8 U10.3 U11.3 U12.3

## Polygon pours and split planes (outlines as drawn)
GND on Top Layer "GND_L01_P055" (solid, remove dead copper, pour order 55): 20.56,74.54 20.57,74.53 22.61,74.53 22.61,70.86 20.57,70.86 20.56,70.87
GND on Top Layer "GND_L01_P054" (solid, remove dead copper, pour order 54): 129.54,88.773 129.54,93.472 134.239,93.472 134.239,88.773
GND on Top Layer "GND_L01_P053" (solid, remove dead copper, pour order 53): 129.921,66.675 133.858,66.675 133.858,62.738 129.921,62.738
GND on Top Layer "GND_L01_P051" (solid, remove dead copper, pour order 51): 65.913,64.262 66.548,64.262 68.961,66.675 68.961,67.056 65.913,67.056
GND on Top Layer "GND_L01_P050" (solid, remove dead copper, pour order 50): 57.15,68.961 65.913,68.961 65.913,64.262 65.659,64.262 57.15,64.262
GND on Top Layer "GND_L01_P049" (solid, remove dead copper, pour order 49): 57.912,95.123 67.691,95.123 67.691,89.408 57.912,89.408
GND on Top Layer "GND_L01_P048" (solid, remove dead copper, pour order 48): 111.125,93.726 110.871,93.726 98.806,93.726 98.806,79.375 99.06,79.121 113.665,79.121 113.665,93.726
V+ on Top Layer "V+_L01_P011" (solid, pour order 11): 118.003,62.103 123.063,67.163 123.063,62.357 122.809,62.103
Vreg on Top Layer "Top Layer-Vreg" (solid, pour order 38): 121.031,105.029 121.031,64.389 98.552,64.389 98.552,78.486 114.173,78.486 114.173,94.163 98.552,94.309 98.552,105.029
GND on Top Layer "GND_L01_P047" (solid, remove dead copper, pour order 47): 139.319,106.934 135.763,106.934 135.509,106.934 130.683,106.934 130.683,109.855 130.937,110.109 139.319,110.109
GND on Top Layer "GND_L01_P045" (solid, remove dead copper, pour order 45): 138.049,111.125 138.049,107.696 140.716,105.029 141.986,105.029 144.653,107.569 144.653,111.125
GND on Top Layer "GND_L01_P044" (solid, remove dead copper, pour order 44): 138.049,111.125 138.049,122.555 144.653,122.555 144.653,111.125
MOTOR_PWR on Top Layer "MOTOR_PWR_L01_P033" (solid, pour order 33): 113.855,18.542 124.777,18.542 124.777,1.778 159.957,1.778 159.957,30.099 113.855,29.972
V+ on Top Layer "V+_L01_P041" (solid, pour order 41): 83.439,36.068 81.407,36.068 81.407,16.891 83.439,16.891
V+ on Top Layer "V+_L01_P043" (solid, pour order 43): 83.058,36.068 101.282,36.068 101.282,34.163 83.058,34.163
3V3_RP2CAN on Top Layer "3V3" (solid, pour order 40): 16.129,51.699 52.919,51.699 52.919,25.943 16.129,25.943
V+ on Top Layer "Top Layer-V+" (solid, pour order 23): 139.065,30.607 139.065,35.941 128.524,35.941 128.524,101.6 121.539,101.6 121.539,63.754 98.489,63.754 98.489,30.607
5V on Top Layer "Top Layer-5V" (solid, pour order 21): 77.467,80.728 69.466,88.729 55.46,88.729 55.46,108.82 51.94,108.82 51.94,104.82 47.686,100.565 31.62,100.565 28.137,104.048 28.137,108.82 24.508,108.82 24.508,102.089 21.968,102.089 21.968,87.103 32.001,87.103 49.527,69.577 77.467,69.577
15V on Top Layer "Top Layer-15V" (solid, pour order 15): 77.343,107.823 67.564,117.602 37.465,117.602 28.94,109.077 28.94,104.013 43.688,104.013 48.895,109.347 56.134,109.347 56.134,95.504 77.343,95.504
VPORT on Top Layer "VPORT_L01_P030" (solid, pour order 30): 143.764,62.438 128.778,62.438 128.778,45.928 143.764,45.928
VSTBD on Top Layer "VSTBD_L01_P029" (solid, pour order 29): 144.145,87.884 129.159,87.884 129.159,71.374 144.145,71.374
GND on Bottom Layer "GND" (solid, pour order 2): 0,6.35 0,120.65 cw(c6.35,120.65) 6.35,127 171.45,127 cw(c171.45,120.65) 177.8,120.65 177.8,6.35 cw(c171.45,6.35) 171.45,0 6.35,0 cw(c6.35,6.35)

## Keep-outs
Keep-Out Layer:
  region: 12.7,6.35 ccw(c6.35,6.35) 6.35,12.7 0,12.7 0,6.35 ccw(c6.35,6.35) 6.35,0 12.7,0
  region: 6.35,114.3 ccw(c6.35,120.65) 12.7,120.65 12.7,127 6.35,127 ccw(c6.35,120.65) 0,120.65 0,114.3
  region: 165.1,120.65 ccw(c171.45,120.65) 171.45,114.3 177.8,114.3 177.8,120.65 ccw(c171.45,120.65) 171.45,127 165.1,127
  region: 171.45,12.7 ccw(c171.45,6.35) 165.1,6.35 165.1,0 171.45,0 ccw(c171.45,6.35) 177.8,6.35 177.8,12.7
  lines w0.254: 0,6.35 ccw(c6.35,6.35) 6.35,0 171.45,0 ccw(c171.45,6.35) 177.8,6.35 177.8,120.65 ccw(c171.45,120.65) 171.45,127 129.286,127 6.35,127 ccw(c6.35,120.65) 0,120.65 0,6.35

## Other copper
Top Layer:
  pour cut-out: 48.706,39.66 48.603,39.387 48.603,38.552 48.756,38.398 49.518,38.398 49.518,39.033 49.264,39.287
  pour cut-out: 35.935,33.094 35.936,33.093 35.936,32.575 41.031,32.603 41.323,32.896 41.323,33.014 40.42,33.014 39.809,33.625 39.246,33.625 38.864,33.243 38.61,33.243
  pour cut-out: 39.293,49.24 33.959,49.24 33.832,49.113 33.832,42.763 37.388,42.763 39.674,44.287
  pour cut-out: 30.657,36.139 31.927,34.869 31.927,33.726 29.641,33.726 29.641,34.615
  pour cut-out: 28.365,33.419 28.371,33.425 28.371,38.93 27.035,38.93 26.341,38.236 26.341,36.392 25.958,36.009 25.958,33.469
  pour cut-out: 21.844,95.758 21.844,93.472 25.4,93.472 25.4,95.758
Bottom Layer:
  pour cut-out: 77.47,8.001 77.47,0.303 79.375,0.303 79.375,9.779
  pour cut-out: 138.681,81.494 138.535,81.348 138.535,78.454 143.861,78.454 143.715,78.6 143.715,81.494

## Silkscreen, mask and mechanical layers (free items; w line width, h text height)
Top Overlay:
  drawing of 80 lines, arcs and shapes, not listed
  text "PWM" at 130.7,126.41 h1.37 r180
  text "GND" at 137.7,126.41 h1.37 r180
  text "5V" at 137.7,123.51 h1.37 r180
  text "CHECK" at 130.7,123.41 h1.37 r180
  text "15V Power" at 79.248,121.031 h0.89
  text "CANL" at 37.745,115.187 h0.85 r180
  text "GND" at 40.617,115.07 h0.89 r180.35
  text "GND" at 43.474,115.074 h0.89 r180.5
  text "GND" at 46.481,115.06 h0.89 r180
  text "GN" at 15.356,114.695 h0.89 r180.5
  text "CANL" at 11.426,114.692 h0.89 r180.35
  text "V+" at 18.049,114.661 h0.89 r179.32
  text "CANH" at 37.782,112.394 h0.85 r180.11
  text "5V" at 40.638,112.208 h0.89 r180.11
  text "15V" at 43.532,112.212 h0.89 r180.41
  text "15V" at 46.522,112.212 h0.89 r180.41
  text "5V" at 14.85,111.899 h0.89 r180.41
  text "15V" at 17.898,111.899 h0.89 r180.41
  text "CANH" at 11.431,111.763 h0.89 r180.11
  text "VREG Power" at 109.601,110.998 h0.89
  text "STACK LINK" at 19.272,108.63 h1.52 r180
  text "CAMERA CAGE" at 46.323,108.249 h1.52 r180
  text "VSTBD" at 168.719,101.092 h1.37 r90
  text "GND" at 171.894,101.092 h1.37 r90
  text "GND" at 1.766,98.035 h0.89 r270.41
  text "FAN" at 5.164,97.4 h1.52 r270.41
  text "PWR" at 1.766,94.987 h0.89 r270.41
  text "TACH" at 1.901,92.013 h0.89 r270.11
  text "STBD BATTERY" at 163.804,91.567 h2.13 r90
  text "STBD Battery" at 147.701,90.932 h0.89
  text "VSTBD" at 168.719,90.932 h1.37 r90
  text "GND" at 171.894,90.932 h1.37 r90
  text "3V3 Power" at 25.908,79.121 h0.89
  text "5v Power" at 35.814,70.231 h0.89
  text "Port Battery" at 149.352,65.151 h0.89
  text "V+ Power" at 89.535,51.054 h0.89
  text "TERM / ON" at 53.84,44.033 h1.02
  text "GND" at 6.303,38.43 h1.37 r270
  text "AUX" at 9.478,38.43 h1.37 r270
  text "Motor Power" at 142.113,37.338 h0.89
  text "VPORT" at 171.132,33.909 h1.37 r90
  text "GND" at 174.308,33.909 h1.37 r90
  text "GND" at 6.303,32.43 h1.37 r270
  text "KILL" at 9.513,32.17 h1.37 r270
  text "BOOT" at 42.567,27.662 h1.02
  text "RESET" at 48.059,27.662 h1.02
  text "P RT BATTERY" at 166.944,24.055 h2.13 r90
  text "VPORT" at 171.132,23.749 h1.37 r90
  text "GND" at 174.308,23.749 h1.37 r90
  text "ESC / PWR" at 141.987,19.939 h3.05
  text "ESC / GND" at 97.157,19.177 h3.05
  text "The Underwater Robotics Team" at 52.197,5.207 h1.52
  text "Poactuator Board" at 59.309,2.159 h1.52
Bottom Overlay:
  region: 3625 vertices and 129 holes, not listed, extent 98.334,40.805 125.328,59.001

## Text inside footprints (layer, text, board x,y; h text height)
U2: Top Overlay "*" at 136.858,102.809 h1.27; Mechanical 13 "*" at 138.763,106.746 h1.27
U5: Top Overlay "*" at 105.981,61.036 h1.27; Mechanical 13 "*" at 109.156,64.44 h1.27
U10: Top Overlay "*" at 78.105,32.893 h1.27; Mechanical 13 "*" at 80.531,31.077 h1.27
U11: Top Overlay "*" at 78.232,25.273 h1.27; Mechanical 13 "*" at 80.658,23.838 h1.27
U12: Top Overlay "*" at 78.613,18.034 h1.27; Mechanical 13 "*" at 80.658,16.345 h1.27
U13: Top Overlay "*" at 64.389,20.828 h1.27; Mechanical 13 "*" at 66.396,19.38 h1.27